# Altium PCB 1000374.PCBDOC
Units mil, origin at the board's own origin, x right, y up, seen from the top; angles counter-clockwise.
Board outline 1660 x 1425 mil, 2 copper layers (Top Layer, Bottom Layer), stack 62.8 mil thick; 9 components, 7 nets, 21 pads, 30 vias.
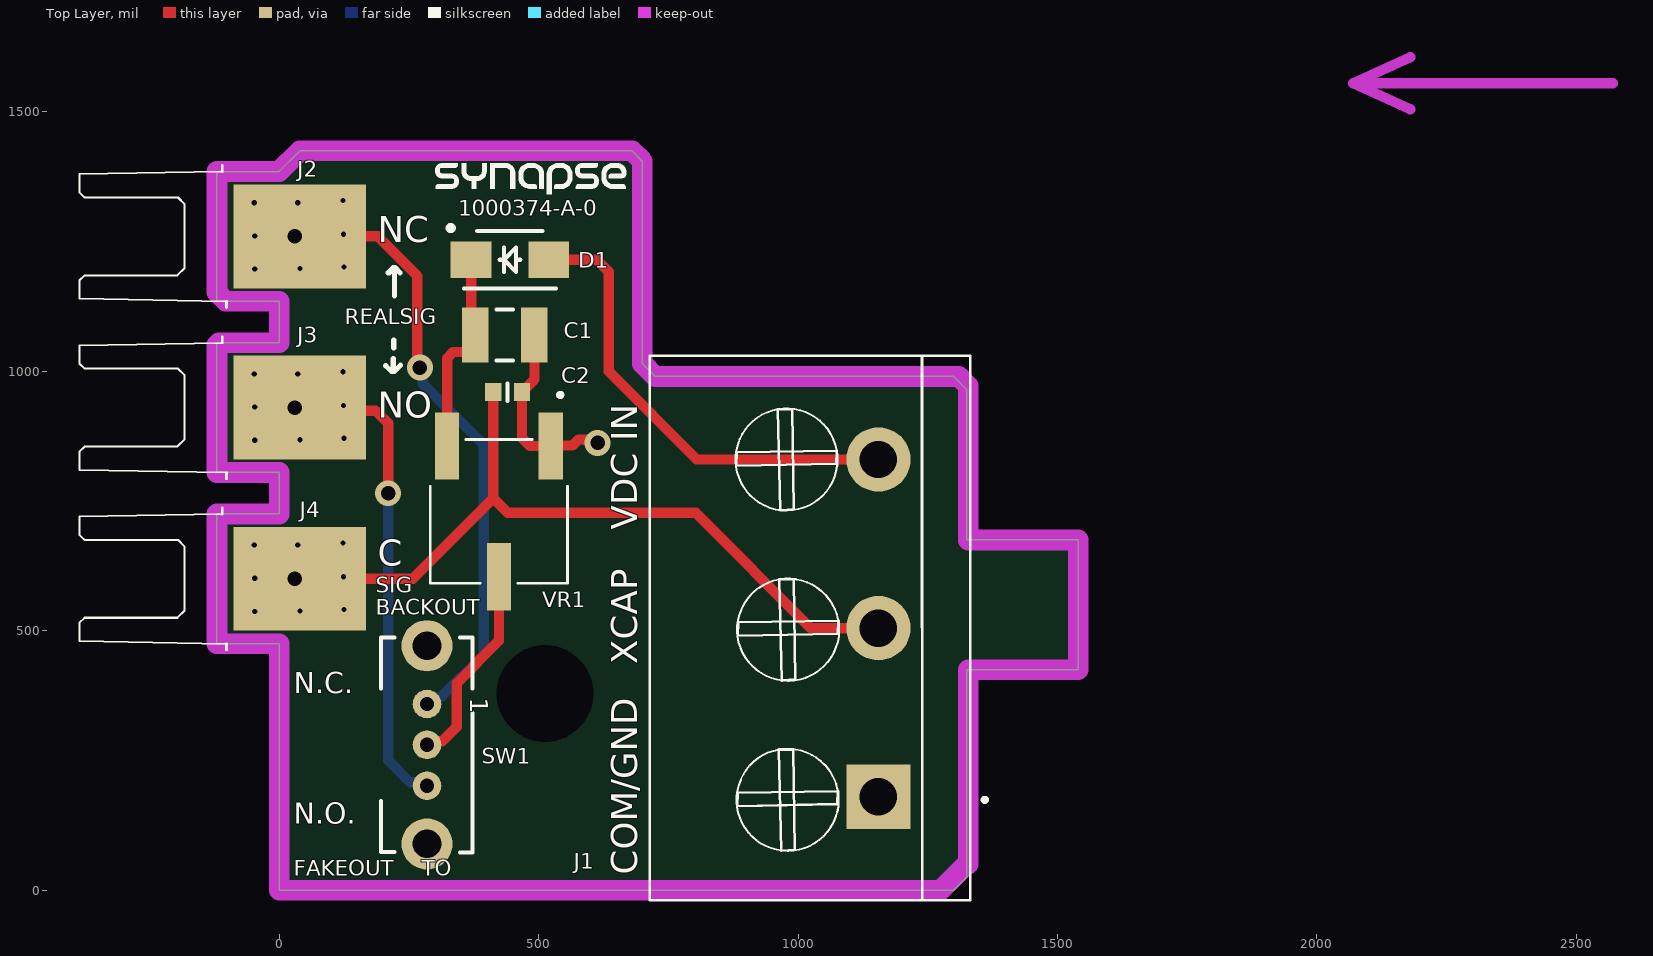
[diagram p0: Top Layer view]
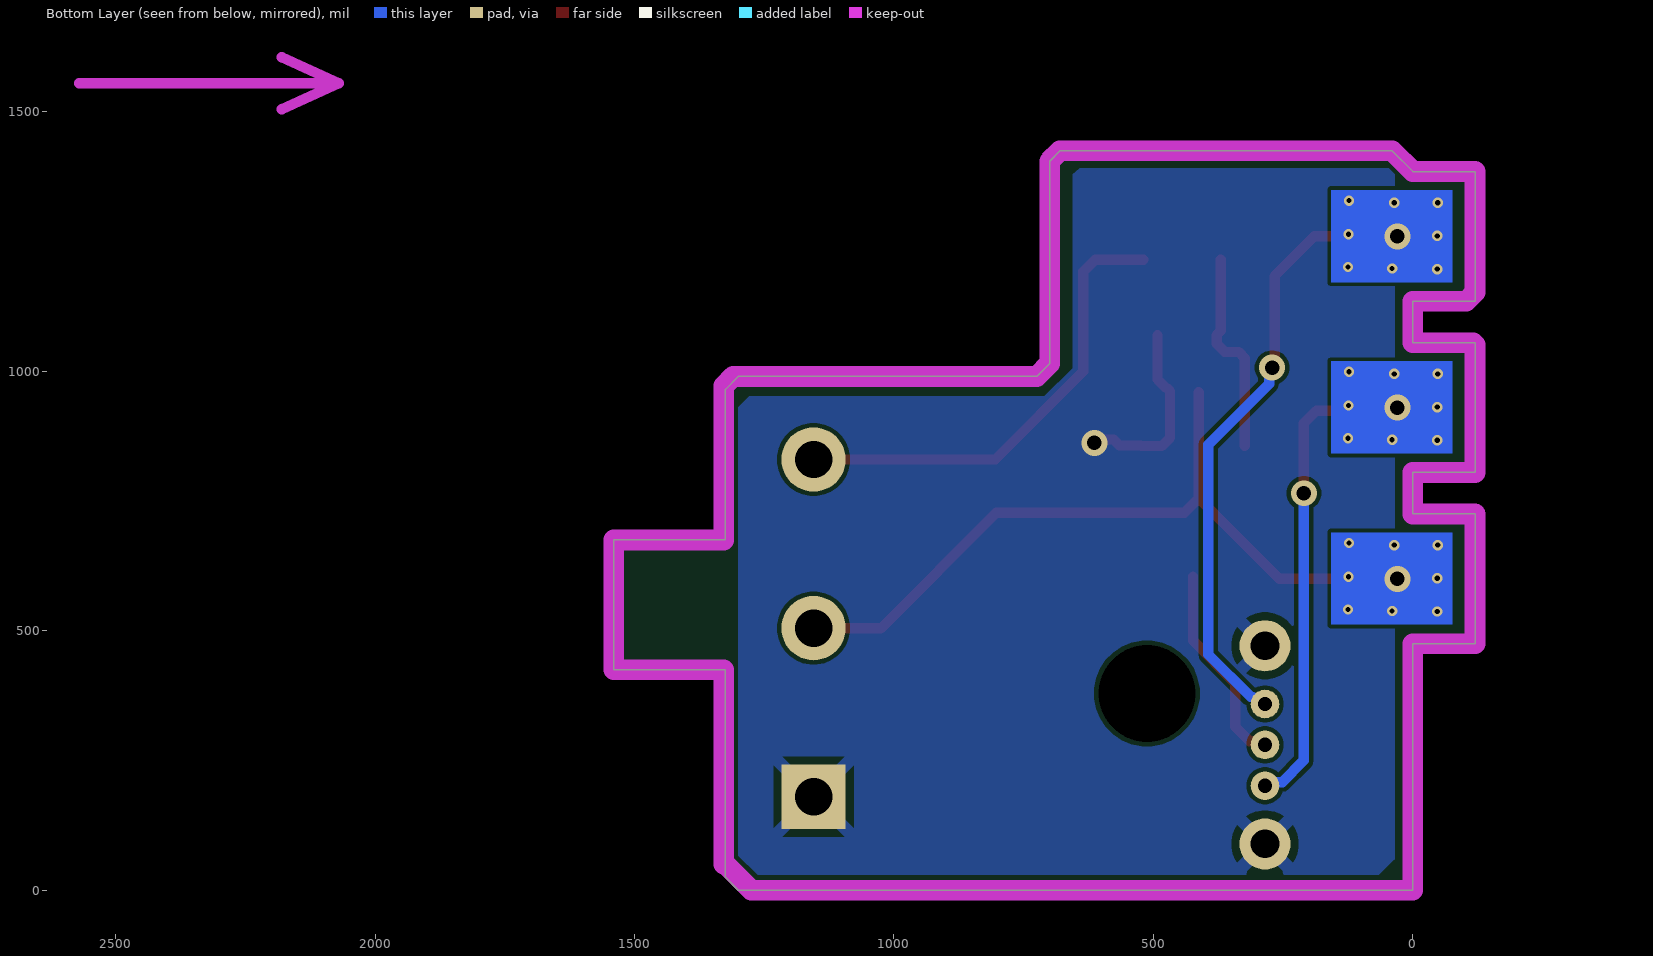
[diagram p1: Bottom Layer view, seen from below]
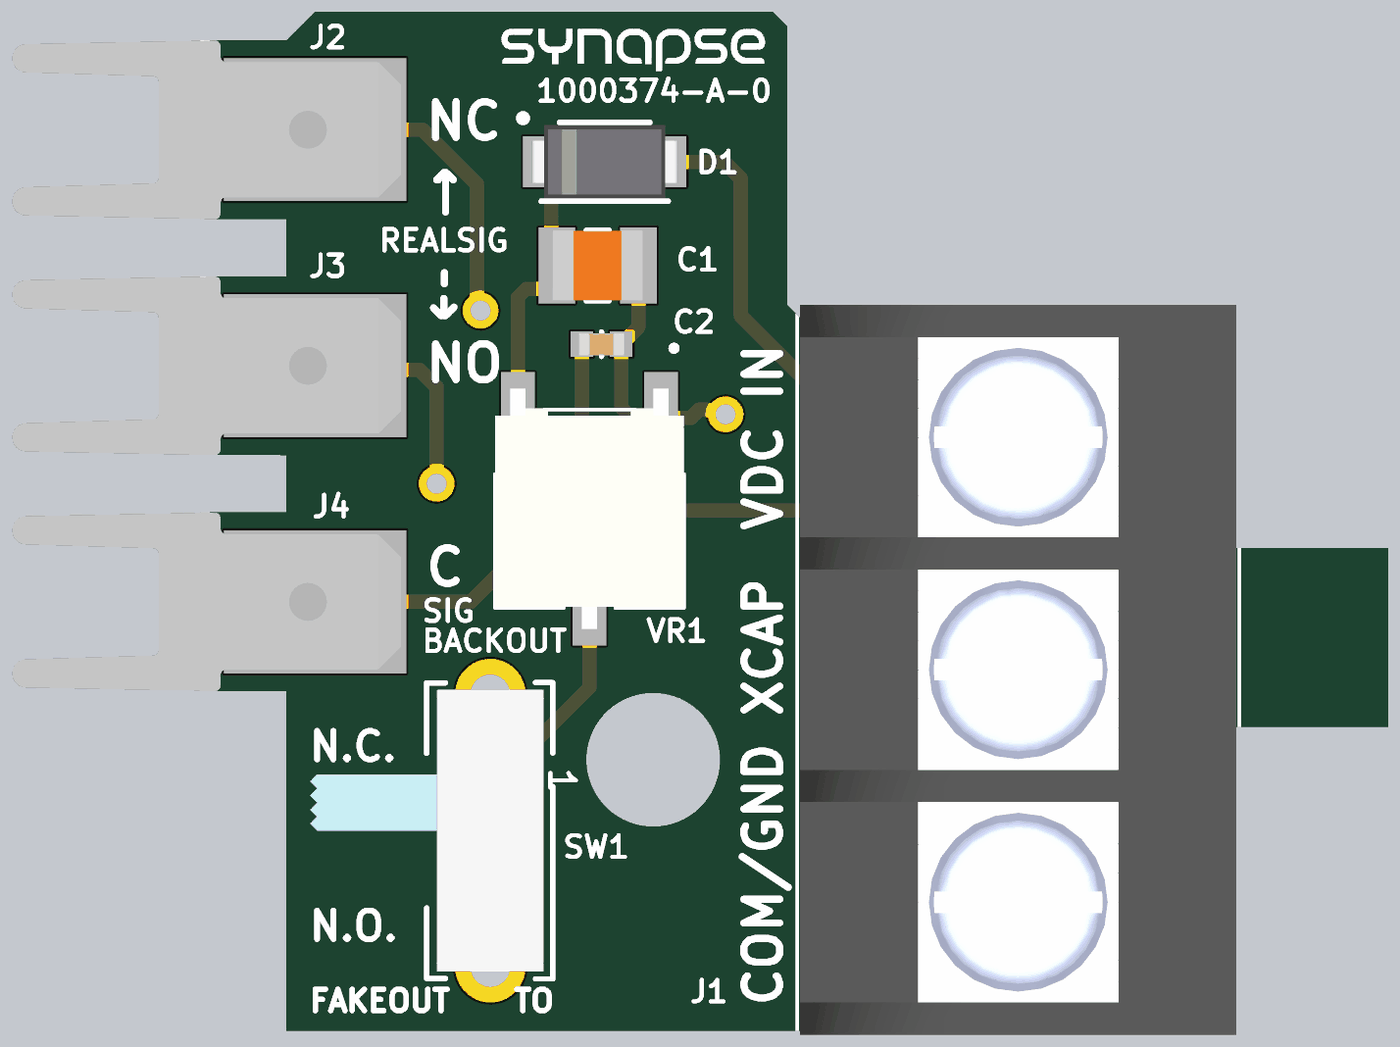
[diagram p2: 3D render of the assembled board from above, using the file's embedded part models]

## Layer stack, top to bottom
Top Solder: solder mask 0.4, Solder Resist, Dk 3.5
Top Layer: signal copper 1.4
Dielectric2: core 60, 370HR, IT180, or Equiv TG FR-4, Dk 4.8
Bottom Layer: signal copper 1.4
Bottom Solder: solder mask 0.4, Solder Resist, Dk 3.5

## Board outline
1540,425 1325,425 1325,25 1300,0 25,0 0,0 0,475 -120,475 -120,725 0,725 0,805 -120,805 -120,1055 0,1055 0,1135 -120,1135 -120,1385 0,1385 40,1425 665,1425 680,1425 700,1405 700,1015 725,990 1300,990 1325,965 1325,675 1540,675

## Design rules (kind name [scope] priority, off if disabled: settings)
AcuteAngle [All] p1: minimum=9.00000000000000E+0001 checktracksonly=TRUE
Clearance "Clearance_Fork Pads" [InPadClass('Fork Pads') vs OnLayer('Keep-Out Layer')] p1: gap=5 ignorepadtopadclearanceinfootprint=FALSE
Clearance "Clearance_NPTH pads" [(InPadClass('NPTH pads'))] p2: gap=30 ignorepadtopadclearanceinfootprint=FALSE except(0: Arc-Hole Track-Hole SMDPad-Hole THPad-Hole Via-Hole Fill-Hole Poly-Hole Region-Hole Text-Hole)
Clearance Fiducials [InPadClass('Fiducials')] p3: gap=40 ignorepadtopadclearanceinfootprint=FALSE except(0: Arc-Hole Track-Hole SMDPad-Hole THPad-Hole Via-Hole Fill-Hole Poly-Hole Region-Hole Text-Hole)
Clearance [All] p4: gap=8 ignorepadtopadclearanceinfootprint=FALSE except(0: Arc-Hole Track-Hole SMDPad-Hole THPad-Hole Via-Hole Fill-Hole Poly-Hole Region-Hole Text-Hole)
FabricationTestPointUsage TestPointUsage [All] p1: valid=0 allowmultiple=FALSE
FabricationTestpoint Testpoint [All] p1: side=3 testpointundercomponent=TRUE minsize=40 maxsize=100 preferedsize=60 minholesize=0 maxholesize=40 preferedholesize=32 testpointgrid=1 allowsidetop=TRUE allowsidebottom=TRUE usegrid=TRUE gridtolerance=0.01
HoleSize [All] p1: absolutevalues=TRUE maxlimit=200 minlimit=5 maxpercent=80.000 minpercent=20.000
MinimumAnnularRing [All] p1: minimumring=5
MinimumSolderMaskSliver [All] p1: minsoldermaskwidth=4
PlaneClearance "PlaneClearance_NPTH pads" [(InPadClass('NPTH pads'))] p1: clearance=30
PlaneClearance [All] p2: clearance=20
PlaneConnect PlaneConnect_vias [IsVia] p1: planeconnectstyle=Direct reliefexpansion=20 reliefentries=4 reliefconductorwidth=10 reliefairgap=10
PlaneConnect PlaneConnect_components [(InComponentClass('All Components'))] p2: planeconnectstyle=Relief reliefexpansion=10 reliefentries=4 reliefconductorwidth=12 reliefairgap=10
PlaneConnect [All] p3: planeconnectstyle=Direct reliefexpansion=10 reliefentries=4 reliefconductorwidth=12 reliefairgap=11
PolygonConnect PTH_PolygonConnect_LRG_PTH [IsPad And (AsMils(HoleDiameter) >= 50)] p1: connectstyle=Relief reliefconductorwidth=25 reliefentries=4 polygonreliefangle="45 Angle" airgapwidth=15
PolygonConnect PTH_PolygonConnect_SML_PTH [IsPad And (AsMils(HoleDiameter) >= 35)] p2: connectstyle=Relief reliefconductorwidth=15 reliefentries=4 polygonreliefangle="45 Angle" airgapwidth=10
PolygonConnect SMT_PolygonConnect_XLRG_SMT [IsPad And (AsMils(HoleDiameter) = 0)And (AsMils(PadXSize_AllLayers) > 100) And (AsMils(PadYSize_AllLayers) > 100)] p3: connectstyle=Relief reliefconductorwidth=50 reliefentries=4 polygonreliefangle="90 Angle" airgapwidth=10
PolygonConnect SMT_PolygonConnect_LRG_SMT [IsPad And (AsMils(HoleDiameter) = 0)And (AsMils(PadXSize_AllLayers) > 35) And (AsMils(PadYSize_AllLayers) > 35)] p4: connectstyle=Relief reliefconductorwidth=20 reliefentries=4 polygonreliefangle="90 Angle" airgapwidth=10
PolygonConnect SMT_PolygonConnect_SML_SMT [IsPad And (AsMils(HoleDiameter) = 0) And (AsMils(PadXSize_AllLayers) > 15) And (AsMils(PadYSize_AllLayers) > 15)] p5: connectstyle=Relief reliefconductorwidth=10 reliefentries=4 polygonreliefangle="90 Angle" airgapwidth=6
PolygonConnect PolygonConnect_vias [IsVia] p6: connectstyle=Direct reliefconductorwidth=10 reliefentries=4 polygonreliefangle="90 Angle" airgapwidth=10
PolygonConnect PolygonConnect_default_component [(InComponentClass('All Components'))] p7: connectstyle=Relief reliefconductorwidth=12 reliefentries=4 polygonreliefangle="90 Angle" airgapwidth=10
PolygonConnect PolygonConnect_catchall [All] p8: connectstyle=Relief reliefconductorwidth=15 reliefentries=4 polygonreliefangle="90 Angle" airgapwidth=10
RoutingVias [All] p1: holewidth=10 width=20 viastyle="Through Hole" minholewidth=10 minwidth=20 maxholewidth=28 maxwidth=50
SilkToSilkClearance [All] p1: silktosilkclearance=4
SilkToSolderMaskClearance SilkscreenOverComponentPads [IsPad] p1: minsilkscreentomaskgap=8 clearancetoexposedcopper=TRUE
SolderMaskExpansion SolderMaskExpansion_vias [isVia] p1: expansion=-3 istentingtop=FALSE
SolderMaskExpansion [All] p2: expansion=3 istentingtop=FALSE
Width [All] p1: maxlimit=20 minlimit=6 preferedwidth=8
22 further rules are at their usual default settings.

## Classes and differential pairs
pad class "Fork Pads": J2-1 J3-1 J4-1

## Components (designator, comment, footprint, x,y, rotation, side; value= is the part's Value field where it differs from the comment)
C1 "GRM32ER71H106KA12L" CAPC1210(3225Metric)N 435,1070 r180 top value=10uF
C2 "C0603C105K3RACTU" CAPC0603(1608Metric)L 440.45,960 r0 top value=1uF
D1 "B360A-13-F" "DIODE_DO-214AC (SMA)_5.3X2.8X2.3MM" 444.87,1215 r0 top
J1 "T42-BS11-03" "TE_2-1437667-5-3 POS" 1155,505 r270 top
J2 "726388-2" TE_726388-2_SM 40,1260 r180 top
J3 "726388-2" TE_726388-2_SM 40,930 r180 top
J4 "726388-2" TE_726388-2_SM 40,600 r180 top
SW1 "EG1213" SWITCH_PTH_E-SWITCH_EG1213 285,280 r270 top
VR1 "3361P-1-103GLF" TRIM_3361P-1-103GLF 423.64,730 r270 top value=10K

## Footprints (in the part's own frame and the unit in brackets; to place one, negate y for a bottom-side part, rotate by r counter-clockwise, add the part's x,y. Pads: shape width x height; smd on the part's side, far side on the other; paste and mask are expansions set on the pad)
CAPC0603(1608Metric)L [mm] "Chip Capacitor, Body 1.6x0.8mm, IPC High Density"
  rect 0.8x0.9 smd: 1(-0.7,0) 2(0.7,0)
  silkscreen extent 0,-0.43 0,0.43, body extent -0.8,-0.4 0.8,0.4, height 0.8
CAPC1210(3225Metric)N [mm] "Chip Capacitor, Body 3.2x2.5mm, IPC Medium Density"
  rect 1.3x2.7 smd: 1(-1.45,0) 2(1.45,0)
  silkscreen extent -0.4,-1.25 0.4,1.25, body extent -1.6,-1.25 1.6,1.25, height 1
"DIODE_DO-214AC (SMA)_5.3X2.8X2.3MM" [mm] "Diode, 2 leads, DO-214AC (SMA), 5.3x2.8x2.3mm"
  rect 2x1.8 smd: A(1.9,0) K(-1.9,0)
  silkscreen extent -3.02,-1.4 2.25,1.67, body extent -2.6,-1.3 2.6,1.3, height 2.45
SWITCH_PTH_E-SWITCH_EG1213 [mm] "E-SWITCH_EG1213_10x8.8x5mm"
  round 1.4 hole 0.7: 1(-2,0) 2(0,0) 3(2,0)
  round 2.5 hole 1.4: 4(-4.85,0) 4(4.85,0)
  silkscreen extent -5.26,-2.26 5.26,2.22, body extent -5,-6.4 5,1.9, height 5.1
"TE_2-1437667-5-3 POS" [mm]
  rect 3.15x3.15 hole 1.829: 1(8.255,0)
  round 3.15 hole 1.829: 2(0,0) 3(-8.255,0)
  silkscreen extent -13.33,-11.2 13.33,5.31, body extent -12.95,-11.1 12.95,4.39, height 12.45
TE_726388-2_SM [mil]
  rect 255x200 smd: 1(0,0)
  Bottom Layer region: 116,88 116,-89 -117,-89 -117,88
  silkscreen extent 141,-137 425,137, body extent -120,-125 423,125, height 20
TRIM_3361P-1-103GLF [mm]
  rect 3.3x1.19 smd: 1(-3.2,2.54) 2(3.2,0) 3(-3.2,-2.54)
  silkscreen extent -5.8,-3.35 3.52,3.35, body extent -4.27,-3.35 4.27,3.35, height 5.84

## Part data
C1: library part CAP441-A.1, "Capacitor, ceramic, 10µF, 50V, 10%, X7R, 1210 (3225 Metric), 2.7 mm height, general purpose", PACKAGE=1210, PART NUMBER=CAP441, TEMP COEFFICIENT=X7R, TOLERANCE=10%, VOLTAGE=50V, BOM NOTE=-, CONSTRUCTION=ceramic, MFG=Murata, MFG PART NUMBER=GRM32ER71H106KA12L, PART DESCRIPTION=CAPACITOR,CER,10µF,50V,10%,X7R,1210, PART TYPE=Capacitor, PRICE=-
C2: library part CAP294, "Capacitor, ceramic, 1uF, 25V, 10%, X7R, 0603 (1608 Metric), 0.9mm height, SMT", PACKAGE=0603, TEMP COEFFICIENT=X7R, TOLERANCE=10%, VOLTAGE=25V, BOM NOTE=-, Component Type=Standard, CONSTRUCTION=ceramic, MFG=KEMET, MFG PART NUMBER=C0603C105K3RACTU, PART DESCRIPTION=CAPACITOR,CER,1uF,25V,10%,X7R,0603, PART NUMBER=CAP294, PART TYPE=Capacitor, Pin Count=2, PRICE=?, Synapse PN=CAP294
D1: library part DIO153-A.1, "Diode, schottky, 60V, 3A, 700mV forward voltage @ 3A, fast recovery, DO-214AC, 5.6x2.9x2.4mm", OPERATING TEMP="-55C - 150C", PART NUMBER=DIO153, BOM NOTE=-, DATASHEET="https://engr.synapse-wireless.com/svn/repo1/Altium Vault/DataSheets/DiodesInc_B360A-13-F.pdf", DATASHEET 2=-, DESIGN NOTE=-, MFG="Diodes Inc", MFG PART NUMBER=B360A-13-F, PART DESCRIPTION="DIODE,SCHOTTKY,FAST REC,60V,3A,DO-214AC", PART TYPE=Diode, PRICE=?
J1: library part CON481, "CONN,BARRIER STRIP, 3POS, 0.325\" PITCH, 14-22AWG,300V,15A,CAPTIVE PLATE,3-WALL,NO COVER", OPERATING TEMP="-40 - 105C", BOM NOTE=-, DESIGN NOTE=-, MFG="SWITCHLAB INC", MFG PART NUMBER=T42-BS11-03, PART DESCRIPTION="CONN,BAR-STRIP,3P 0.325\"PITCH,14-22AWG,300V,15A,N-COV,3WL", PART NUMBER=CON481, PART TYPE=Connector, PRICE=?
J2 J3 J4: library part CON???, "Connector, SMT EDGE, QC TAB, SOLDER, for screw fork use, 13.8x6.4x4.75mm", MFG PART NUMBER=142-0771-831, PART NUMBER=CON237, BOM NOTE=-, DATASHEET="https://engr.synapse-wireless.com/svn/repo1/Altium Vault/Components/Connectors/RF/Data Sheets/EMERSON_142-0771-831.pdf", DATASHEET 2="https://engr.synapse-wireless.com/svn/repo1/Altium Vault/Components/Connectors/RF/Data Sheets/EMERSON_142-0771-831_DRAWING.pdf", DESIGN NOTE=-, MFG=EMERSON, PART DESCRIPTION="CONN,RF SMA JACK,FEMALE,THREADED,SMT", PART TYPE=Connector, PRICE=?
SW1: library part SW044-A.1, "Switch, slide, SPDT, standard, 200mA, 30V, RA, PTH, 10x8.8x5mm", OPERATING TEMP="-20C - 70C", PART NUMBER=SW044, BOM NOTE=-, DATASHEET="https://engr.synapse-wireless.com/svn/repo1/Altium Vault/DataSheets/ESwitch_EG1213.pdf", DATASHEET 2="https://engr.synapse-wireless.com/svn/repo1/Altium Vault/DataSheets/ESwitch_EG1213_2.pdf", DESIGN NOTE=-, MFG=E-Switch, MFG PART NUMBER=EG1213, PART DESCRIPTION=SWITCH,SLIDE,SPDT,200mA,30VDC,RA,PTH, PART TYPE=Switch, PRICE=?
VR1: library part POTEN002, "Potentiometer, trimmer, cermet, 10K, 0.5W, top adjust, 1.0 turns, 10%, 100ppm, SM, 7.04mmx6.7mm", BOM NOTE=-, DESIGN NOTE=-, MFG=BOURNS, MFG PART NUMBER=3361P-1-103GLF, PART DESCRIPTION="POTENTIOMETER, TRIM, 10K, 1.0 TURN TOP ADJ, SM, GULL WING", PART NUMBER=POTEN002, PART TYPE=potentiometer, PRICE=?

## Free pads (board coordinates)
  round 0 hole 187 unplated mask+80: NPTH(512.67,379.15)

## Via types
v1: diameter 20, hole 10, Top Layer to Bottom Layer, 24 vias
v2: diameter 50, hole 28, Top Layer to Bottom Layer, 6 vias

## Nets (pads, with @x,y where several pads share a name; then routed paths per layer and width w, separated by ;. In a path a pad name is that pad's centre, name@x,y a point inside that pad or via, vN(x,y) a via of type N, cw(c..) or ccw(c..) an arc to the next point about the centre after c; other vN are vias at no path point)
+VDC: C1.2 D1.K VR1.3 | length 400.5
  Top Layer w20: VR1.3 323.64,1025.56 335.36,1037.27 362.32,1037.27 377.91,1052.86 C1.2 370.07,1077.84 D1.K
CAP: C2.1 J1.2 J4.1 | length 1485.8
  Top Layer w20: J4.1 255.91,600 ; 257.91,600 412.89,754.99 ; C2.1 412.89,754.99 ; J1.2 1025,505 802.63,727.37 440.51,727.37 412.89,754.99
  other v1: -47,537 40,538 125,541 -47,601 124,604 -48,665 36,665 123,669
  other v2: 30,600
GND: C1.1 C2.2 J1.1 SW1.4 VR1.1 | length 369.6
  Top Layer w20: C1.1 492.08,984.07 475.73,967.72 473.76,967.72 468.01,961.97 C2.2 468.01,871.8 483.82,855.98 VR1.1 524.59,856.93 565.35,856.93 577,868.58 587.13,868.58 587.94,867.77 608.11,867.77 v2(613.85,862.03)
NC: J2.1 SW1.1 | length 1201.7
  Top Layer w20: J2.1@28,1260 190,1260 266.27,1183.73 266.27,1012.01 v2(271.27,1007.01)
  Bottom Layer w20: v2(271.27,1007.01) 277.01,1001.27 277.01,975.76 394.57,858.2 394.57,454.18 312.77,372.37 308.14,372.37 294.5,358.74 SW1.1
  other v1: -47,1197 40,1198 125,1201 -47,1261 124,1264 -48,1325 36,1325 123,1329
  other v2: 30,1260
NetD1_A: D1.A J1.3 | length 907.3
  Top Layer w20: D1.A 612.08,1215 635,1192.08 635,1000 805,830 J1.3
NO: J3.1 SW1.3 | length 927.6
  Top Layer w20: J3.1 45.78,924.22 185.78,924.22 210,900 v2(210,765)
  Bottom Layer w20: v2(210,765) 210,250 252.02,207.98 278.28,207.98 SW1.3
  other v1: -47,867 40,868 125,871 -47,931 124,934 -48,995 36,995 123,999
  other v2: 30,930
SIGNAL: SW1.2 VR1.2 | length 394.6
  Top Layer w20: SW1.2 291.72,286.72 314.19,286.72 342.48,315 342.48,399.21 423.64,480.37 VR1.2

## Polygon pours and split planes (outlines as drawn)
GND on Bottom Layer "GND_L02_P000" (solid, remove dead copper, pour order 0): 35.01,60 35.01,56.01 35.01,1381.43 45.21,1391.43 630.44,1391.43 637.22,1391.43 642,1391.43 655.23,1380.11 655.23,1006.1 710.69,951.74 1278.63,951.74 1300,930.79 1300,66.46 1262.81,30 65.61,30

## Keep-outs
Keep-Out Layer:
  lines w20: 2180,1505 2070,1555 ; 2180,1605 2070,1555 ; 2570,1555 2070,1555
  lines w40: 1325,50 1275,0 0,0 0,475 -120,475 -120,724.73 -119.73,725 0,725 0,805 -120,805 -120,1051 -116,1055 0,1055 0,1135 -102.75,1135 -120,1152.25 -120,1385 0,1385 40,1425 680,1425 700,1405 700,1015 725,990 1310,990 1328.23,971.77 1328.23,675 1540,675 1540,425 1328.23,425 1328.23,50
  text "KEEP OUT LAYER SHOULD REPLICATE BOARD OUTLINE." at 2590,1585 h60
  text "KEEP OUT LAYER SHOULD HAVE 40 MIL WIDTH." at 2590,1475 h60

## Silkscreen, mask and mechanical layers (free items; w line width, h text height)
Top Overlay:
  drawing of 19 lines, arcs and shapes, not listed
  text "1000374-A-0" at 345.67,1300 h30
  text "NC" at 190,1248.62 h50
  text "REALSIG" at 126,1091 h30
  text "NO" at 190,910.01 h50
  text "VDC IN" at 690,695 h50 r90
  text "C" at 190,625 h50
  text "SIG" at 186,573.04 h30
  text "BACKOUT" at 186,531.02 h30
  text "XCAP" at 690,435 h50 r90
  text "N.C." at 28,379.15 h40
  text "N.O." at 28,128 h40
  text "COM/GND" at 690,30.01 h50 r90
  text "FAKEOUT    TO" at 28,28.01 h30
BoardOutline:
  lines w2: 700,1015 700,1015 ; 700,1015 725,990 ; 700,1015 700,1405 680,1425 40,1425 0,1385 -120,1385 -120,1135 0,1135 0,1055 -120,1055 -120,805 0,805 0,725 -120,725 -120,475 0,475 0,0 1260,0 1300,0 1325,25 1325,280.05 1325,425 1540,425 1540,675 1325,675 1325,965 1300,990 745,990 725,990 ; 725,990 725,990
BorderTop:
  drawing of 67 lines, arcs and shapes, not listed
  text "1" at -6106.66,6559 h70
  text "2" at -3281,6559 h70
  text "3" at -456,6559 h70
  text "4" at 2385.01,6559 h70
  text "5" at 5219,6559 h70
  text "6" at 8054,6559 h70
  text "REVISIONS" at 6350,6290 h120
  text "REV" at 4495,6000 h120
  text "DATE" at 8090,6000 h120
  text "APP" at 8785,6000 h120
  text "DESCRIPTION" at 5820,5995 h120
  text "8/8/22" at 8060,5765 h80
  text "JJD" at 8760,5755 h120
  text "A-0" at 4520,5730 h120
  text "INITIAL RELEASE" at 4955,5725 h120
  text "A" at -7433,5316 h70
  text "A" at 9367,5316 h70
  text "B" at -7433,2582.02 h70
  text "B" at 9367,2582.02 h70
  text "C" at 9348,-116 h70
  text "C" at -7433,-199 h70
  text "ENGINEER:" at 4843,-3007 h45
  text "TITLE:" at 6343,-3007 h45
  text "D" at -7433,-3021 h70
  text "D" at 9367,-3021 h70
  text "PROPRIETARY NOTICE" at 628,-3097 h200
  text "Jos Dominguez" at 5133,-3122 h100
  text "This document contains proprietary information and such information" at 43,-3277 h100
  text "PCB DESIGNER:" at 4843,-3302 h45
  text "may not be disclosed to others for any purpose or used for" at 43,-3382 h100
  text "Synapse Wireless Inc." at 3220,-3392.31 h150
  text "Jos Dominguez" at 5133,-3432 h100
  text "manufacturing purposes without written permission from Synapse" at 38,-3497 h100
  text "6723 Odyssey Drive" at 3220,-3546.69 h150
  text "Wireless Inc." at 38,-3607 h100
  text "DATE:" at 4843,-3607 h45
  text "DWG NO.:" at 6343,-3607 h45
  text "REV:" at 8443,-3607 h45
  text "Huntsville, AL" at 3220,-3701.06 h150
  text ".PRINT_DATE" at 4893,-3727 h70
  text "The United States Government and other recipients shall not be" at 38,-3777 h100
  text "35806" at 3220,-3855.43 h150
  text "bound by this restriction to the extent they have by written contract" at 38,-3872 h100
  text "FILE NAME:" at 4843,-3907 h45
  text "PART NO:" at 6343,-3907 h45
  text "SCALE:" at 8443,-3907 h45
  text "acquired greater rights." at 38,-3962 h100
  text "256-852-7888" at 3220,-4008 h150
  text ".PCB_FILE_NAME_NO_PATH" at 4893,-4027 h70
  text ".Print_Scale" at 8438,-4058 h150
  text "1" at -6106.66,-4241 h70
  text "2" at -3281,-4241 h70
  text "3" at -456,-4241 h70
  text "4" at 2385.01,-4241 h70
  text "5" at 5219,-4241 h70
  text "6" at 8054,-4241 h70
Drill Drawing:
  circle w10: c3829.16,-2169.17 r33.33
  lines w10: 3795.82,-2335.83 3812.49,-2335.83 3812.49,-2352.5 3845.82,-2352.5 3845.82,-2335.83 3862.49,-2335.83 3862.49,-2302.5 3845.82,-2302.5 3845.82,-2285.83 3812.49,-2285.83 3812.49,-2302.5 3795.82,-2302.5 3795.82,-2335.83 ; 3795.82,-2052.5 3862.49,-2052.5 3862.49,-1985.83 3795.82,-1985.83 3795.82,-2052.5 ; 3795.82,-1885.83 3812.49,-1885.83 3829.16,-1902.5 3845.82,-1885.83 3862.49,-1885.83 3845.82,-1869.17 3862.49,-1852.5 3845.82,-1852.5 3829.16,-1835.83 3812.49,-1852.5 3795.82,-1852.5 3812.49,-1869.17 3795.82,-1885.83 ; 3795.82,-1685.83 3862.49,-1685.83 3829.16,-1752.5 3795.82,-1685.83 ; 3795.82,-1602.5 3829.16,-1585.83 3862.49,-1602.5 3845.82,-1569.17 3862.49,-1535.83 3829.16,-1552.5 3795.82,-1535.83 3812.49,-1569.17 3795.82,-1602.5
  lines w15: 3736.03,-2397.5 7261.11,-2397.5 ; 3736.03,-1497.5 7261.11,-1497.5 ; 4286.91,-2547.5 4286.91,-1347.5 ; 4826.77,-2547.5 4826.77,-1347.5 ; 5976.43,-2547.5 5976.43,-1347.5 ; 6482.31,-2547.5 6482.31,-1347.5 ; 3736.03,-2547.5 7261.11,-2547.5 7261.11,-1347.5 3736.03,-1347.5 3736.03,-2547.5
  text "Symbol" at 3826.03,-1452.5 h72
  text "Count" at 4331.91,-1452.5 h72
  text "Hole Size" at 4871.77,-1452.5 h72
  text "Plated" at 6021.43,-1452.5 h72
  text "Hole Type" at 6527.31,-1452.5 h72
  text "1" at 4331.91,-1602.5 h60
  text "4.750mm (187.00mil)" at 4871.77,-1602.5 h60
  text "NPTH" at 6021.43,-1602.5 h60
  text "Round" at 6527.31,-1602.5 h60
  text "2" at 4331.91,-1752.5 h60
  text "1.400mm (55.12mil)" at 4871.77,-1752.5 h60
  text "PTH" at 6021.43,-1752.5 h60
  text "Round" at 6527.31,-1752.5 h60
  text "3" at 4331.91,-1902.5 h60
  text "0.700mm (27.56mil)" at 4871.77,-1902.5 h60
  text "PTH" at 6021.43,-1902.5 h60
  text "Round" at 6527.31,-1902.5 h60
  text "3" at 4331.91,-2052.5 h60
  text "1.829mm (72.00mil)" at 4871.77,-2052.5 h60
  text "PTH" at 6021.43,-2052.5 h60
  text "Round" at 6527.31,-2052.5 h60
  text "6" at 4331.91,-2202.5 h60
  text "0.711mm (28.00mil)" at 4871.77,-2202.5 h60
  text "PTH" at 6021.43,-2202.5 h60
  text "Round" at 6527.31,-2202.5 h60
  text "24" at 4331.91,-2352.5 h60
  text "0.254mm (10.00mil)" at 4871.77,-2352.5 h60
  text "PTH" at 6021.43,-2352.5 h60
  text "Round" at 6527.31,-2352.5 h60
  text "39 Total" at 4331.91,-2502.5 h60
  text "1) All drills are to be considered finished hole size" at 3732,-2675 h60
  text "2) Finished hole size tolerance +/-3 mils" at 3732,-2775 h60
AssemblyTop:
  text "ASSEMBLY NOTES:" at -7020,3005 h150
  text "1) Paste Layer was created one-to-one for most pads." at -7032.86,2868.91 h150
  text "Make any necessary adjustments to any paste layer" at -6872.86,2706.17 h150
  text "shapes for best manufacturability with your process." at -6872.86,2543.43 h150
  text "In particular, the paste shapes under QFN parts" at -6872.86,2379.08 h150
  text "may need to be adjusted." at -6872.86,2217.95 h150
  text "2) Finished PCB assembly shall be RoHS compliant." at -7033.01,2055.22 h150
  text "3) PCB assemblies shall be completely removed from panel." at -7032.86,1892.48 h150
  text "Any PCB breakout tabs shall be ground flush." at -6872.86,1729.74 h150
  text "4) PCB assembly shall meet Class 2 requirements" at -7032.86,1567 h150
  text "of IPC-A-610, Rev F or later." at -6872.86,1404.26 h150
  text "5) No solder shall be applied to test points." at -7032.86,1241.52 h150
  text "6) All rework or modification shall be performed in" at -7032.72,1078.79 h150
  text "accordance with IPC-7711/7721 Revision C or later." at -6872.86,916.05 h150
  text "7) Voids in soldered connection of LGA pads at MODx (SMxx0 Module) must not exceed 30% (@ENGR TOTO)" at -7032.72,405 h150
  text "TOP ASSEMBLY" at 6558.85,-3046.74 h80
  text ".AssemblyName" at 6371.16,-3397.88 h200
  text ".PCBArevision" at 8648,-3712 h140
  text ".AssemblyNumber" at 6597,-3755 h200
FabTop:
  lines w8: 445,1260 1595,1672.76 ; 28,885.01 730,885.01 730,1381.23 28,1381.23 28,885.01
  lines w15: -7139.66,4975 -6729.74,4975 -5800,4975 -5330.11,4975 -3440.67,4975 -2790.84,4975 -2220.98,4975 ; -7139.66,5095 -6729.74,5095 -5800,5095 -5330.11,5095 -3440.67,5095 -2790.84,5095 -2220.98,5095 ; -7139.66,5215 -6729.74,5215 -5800,5215 -5330.11,5215 -3440.67,5215 -2790.84,5215 -2220.98,5215 ; -7139.66,5335 -6729.74,5335 -5800,5335 -5330.11,5335 -3440.67,5335 -2790.84,5335 -2220.98,5335 ; -7139.66,5455 -6729.74,5455 -5800,5455 -5330.11,5455 -3440.67,5455 -2790.84,5455 -2220.98,5455 ; -7139.66,5575 -6729.74,5575 -5800,5575 -5330.11,5575 -3440.67,5575 -2790.84,5575 -2220.98,5575 ; -7139.66,5695 -2220.98,5695 ; -6729.74,5815 -6729.74,4855 ; -5800,5815 -5800,4855 ; -5330.11,5815 -5330.11,4855 ; -3440.67,5815 -3440.67,4855 ; -2790.84,5815 -2790.84,4855 ; -6729.74,4855 -5800,4855 ; -6729.74,4855 -7139.66,4855 -7139.66,5815 -2220.98,5815 -2220.98,4855 -2790.84,4855 ; -5800,4855 -5330.11,4855 ; -5330.11,4855 -3440.67,4855 ; -3440.67,4855 -2790.84,4855
  text "Layer" at -7069.66,5725 h60
  text "Name" at -6659.74,5725 h60
  text "Gerber" at -5730,5725 h60
  text "Material" at -5260.11,5725 h60
  text "Thickness" at -3370.67,5725 h60
  text "Constant" at -2720.84,5725 h60
  text "Top Overlay" at -6659.74,5605 h60
  text "GTO" at -5730,5605 h60
  text "Top Solder" at -6659.74,5485 h60
  text "GTS" at -5730,5485 h60
  text "Solder Resist" at -5260.11,5485 h60
  text "0.40mil" at -3370.67,5485 h60
  text "3.5" at -2720.84,5485 h60
  text "1" at -7069.66,5365 h60
  text "Top Layer" at -6659.74,5365 h60
  text "GTL" at -5730,5365 h60
  text "1.40mil" at -3370.67,5365 h60
  text "Dielectric2" at -6659.74,5245 h60
  text "370HR, IT180, or Equiv TG FR-4" at -5260.11,5245 h60
  text "60.00mil" at -3370.67,5245 h60
  text "4.8" at -2720.84,5245 h60
  text "2" at -7069.66,5125 h60
  text "Bottom Layer" at -6659.74,5125 h60
  text "GBL" at -5730,5125 h60
  text "1.40mil" at -3370.67,5125 h60
  text "Bottom Solder" at -6659.74,5005 h60
  text "GBS" at -5730,5005 h60
  text "Solder Resist" at -5260.11,5005 h60
  text "0.40mil" at -3370.67,5005 h60
  text "3.5" at -2720.84,5005 h60
  text "Bottom Overlay" at -6659.74,4885 h60
  text "GBO" at -5730,4885 h60
  text "NOTE: CONTROLLED IMPEDANCE, <Impedence> @ <frequency>" at -6389,4584.33 h120
  text "<start layer> to <reference layer> are <width> TRACES" at -5914,4451 h120
  text "Place PCB Logo and" at 1640,1820 h120
  text "other labeling here" at 1639.49,1705 h120
  text "on BOTTOM" at 1640,1590 h120
  text "Layer in this area" at 1640,1480 h120
  text "NOTE: PCB outline on *.GM1" at -6975,1168 h120
  text "NOTE: PCB V-score on *.GM2" at -6975,1020 h120
  text "1) PCB Thickness:  0.062 inches +/- 10%" at -7005.51,784 h120
  text "2) Fabricate PCB in accordance with IPC-6012A, Class 2; per IPC-6011 using customer supplied data files." at -7005.61,653.47 h120
  text "3) Material: 370HR, IT180 or Equivalent TG FR-4" at -7005.51,522.94 h120
  text "4) Finished PCB shall be RoHS compliant and lead free assembly process compatible." at -7005.53,392.41 h120
  text "5) Plating: <Plating type> ENIG, HASL, Lead Free HAL, Immersion Silver" at -7005.53,261.88 h120
  text "6) Hole plating thickness shall comply with current revision of IPC-6012 specification for Class 2 products." at -7005.53,131.35 h120
  text "Holes shall not be copper plated closed." at -6876.02,-0.22 h120
  text "7) Soldermask: RED" at -7005.53,-129.71 h120
  text "8) Only via holes specified as tented shall be covered with solder mask.  All other vias are encroached only." at -7005.53,-260.24 h120
  text "9) Only solder mask images that are the same size as the component pads may be enlarged, and" at -7005.53,-390.77 h120
  text "shall not be enlarged beyond 0.076mm (0.003”) per side or 0.15mm (0.006”) overall." at -6876.02,-521.29 h120
  text "10) Silkscreen shall be permanent, non-conductive WHITE ink." at -7005.53,-651.82 h120
  text "11) No Thieving is allowed anywhere on any layer except on PCB rails for manufacturing." at -7005.53,-782.35 h120
  text "12) There shall be no silkscreen on any solderable component pad." at -7005.53,-912.88 h120
  text "13) A copy of the working gerbers shall be provided to Synapse Wireless Inc, upon request." at -7005.53,-1043.41 h120
  text "14) PCB shall be 100% netlist tested.  In case supplied netlist cannot be used, the PCB" at -7005.53,-1173.94 h120
  text "shall be 100% netlist tested using the netlist extracted from Gerber files." at -6855.02,-1304.47 h120
  text "15) If panelization is required, the vendor shall provide panelization gerber data to Synapse Wireless Inc, upon request." at -7000.02,-1435 h120
  text "TOP FAB" at 6556.85,-3040.74 h80
  text ".PCBName" at 6363.16,-3401.88 h200
  text ".PCBrevision" at 8648,-3712 h140
  text ".PCBNumber" at 6600,-3759 h200
BorderBottom:
  drawing of 67 lines, arcs and shapes, not listed
  text "6" at -6070,6559 h70
  text "5" at -3235,6559 h70
  text "4" at -401.01,6559 h70
  text "3" at 2440,6559 h70
  text "2" at 5265,6559 h70
  text "1" at 8090.66,6559 h70
  text "REVISIONS" at -4366,6290 h120
  text "APP" at -6801,6000 h120
  text "DATE" at -6106,6000 h120
  text "REV" at -2511,6000 h120
  text "DESCRIPTION" at -3836,5995 h120
  text "8/8/22" at -6090,5765 h80
  text "INITIAL RELEASE" at -3065,5755 h120
  text "JJD" at -6820,5750 h120
  text "A-0" at -2515,5740 h120
  text "A" at -7383,5316 h70
  text "A" at 9417,5316 h70
  text "B" at -7383,2582.02 h70
  text "B" at 9417,2582.02 h70
  text "C" at -7364,-116 h70
  text "C" at 9417,-199 h70
  text "TITLE:" at -4359,-3007 h45
  text "ENGINEER:" at -2859,-3007 h45
  text "D" at -7383,-3021 h70
  text "D" at 9417,-3021 h70
  text "PROPRIETARY NOTICE" at 1356,-3097 h200
  text "<YOUR NAME>" at -3149,-3122 h100
  text "This document contains proprietary information and such information" at 1941,-3277 h100
  text "PCB DESIGNER:" at -2859,-3302 h45
  text "may not be disclosed to others for any purpose or used for" at 1941,-3382 h100
  text "Synapse Wireless Inc." at -1236,-3392.31 h150
  text "<YOUR NAME>" at -3149,-3432 h100
  text "manufacturing purposes without written permission from Synapse" at 1946,-3497 h100
  text "6723 Odyssey Drive" at -1236,-3546.69 h150
  text "REV:" at -6459,-3607 h45
  text "DWG NO.:" at -4359,-3607 h45
  text "DATE:" at -2859,-3607 h45
  text "Wireless Inc." at 1946,-3607 h100
  text "Huntsville, AL" at -1236,-3701.06 h150
  text ".PRINT_DATE" at -2909,-3727 h70
  text "The United States Government and other recipients shall not be" at 1946,-3777 h100
  text "35806" at -1236,-3855.43 h150
  text "bound by this restriction to the extent they have by written contract" at 1946,-3872 h100
  text "SCALE:" at -6459,-3907 h45
  text "PART NO:" at -4359,-3907 h45
  text "FILE NAME:" at -2859,-3907 h45
  text "acquired greater rights." at 1946,-3962 h100
  text "256-852-7888" at -1236,-4008 h150
  text ".PCB_FILE_NAME_NO_PATH" at -2909,-4027 h70
  text ".Print_Scale" at -6454,-4058 h150
  text "6" at -6070,-4241 h70
  text "5" at -3235,-4241 h70
  text "4" at -401.01,-4241 h70
  text "3" at 2440,-4241 h70
  text "2" at 5265,-4241 h70
  text "1" at 8090.66,-4241 h70
AssemblyBottom:
  text "BOTTOM ASSEMBLY" at -4559.01,-3047 h80
  text ".AssemblyName" at -4400,-3366 h200
  text ".PCBArevision" at -6675,-3716 h140
  text ".AssemblyNumber" at -4740,-3736 h200
Dimension:
  text "DIMENSIONS ARE FOR REFERENCE ONLY" at 50,2209 h60

## Dimensions
0,1380 to 700,1405 on BorderTop
1310,990 to 1260,0 on BorderTop
-115,1445 to 1332.16,1029.61 on BorderTop
-85,1425 to 0,0 on BorderTop

## Text inside footprints (layer, text, board x,y; h text height)
J2: PlacementNotes "PCB Edge" at -131,1065.67 h40 r180
J3: PlacementNotes "PCB Edge" at -131,735.67 h40 r180
J4: PlacementNotes "PCB Edge" at -131,405.67 h40 r180
SW1: Top Overlay "1" at 368.71,371.15 h35.43 r270; PlacementNotes "1" at 368.71,371.15 h35.43 r270